# Altium PCB PCB2.PcbDoc
Units mil, origin at the board's own origin, x right, y up, seen from the top; angles counter-clockwise.
Board outline 6000 x 4000 mil, 2 copper layers (Top Layer, Bottom Layer); 25 components, 24 nets, 130 pads, 0 vias.
Unrouted connection lines stored in the file: 72.
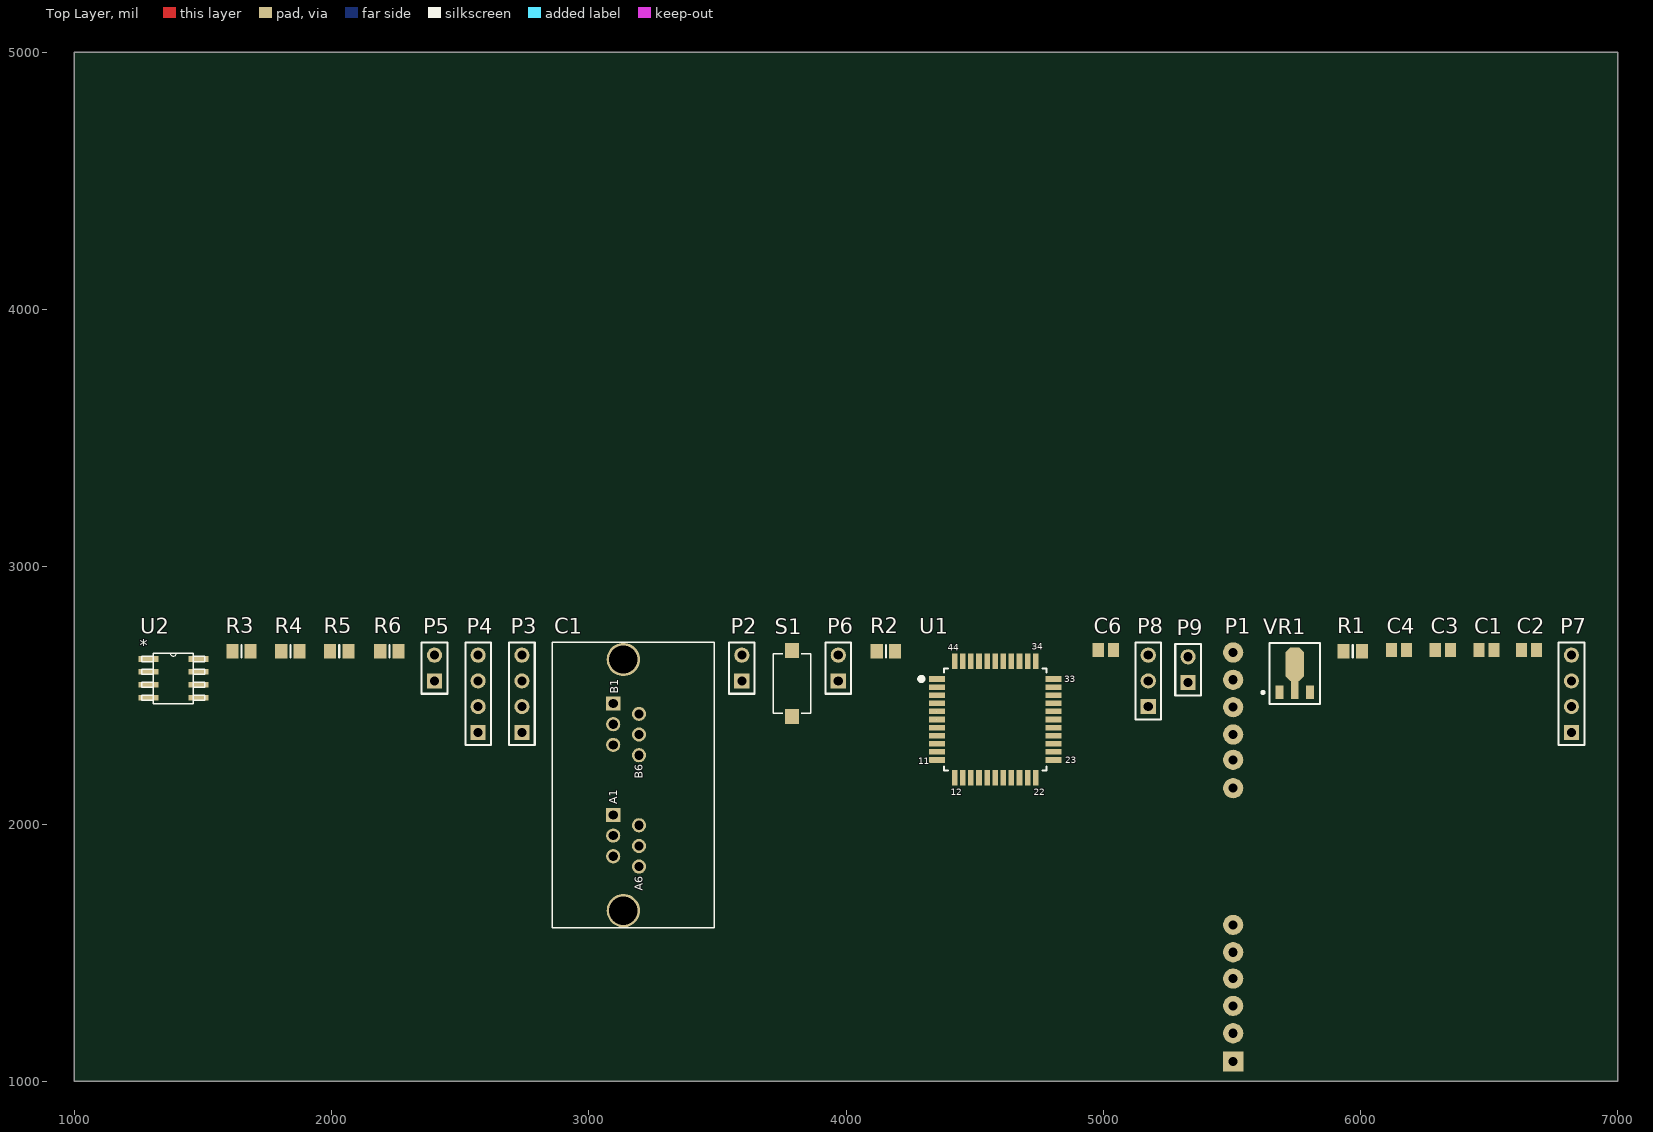
[diagram p0: Top Layer view]
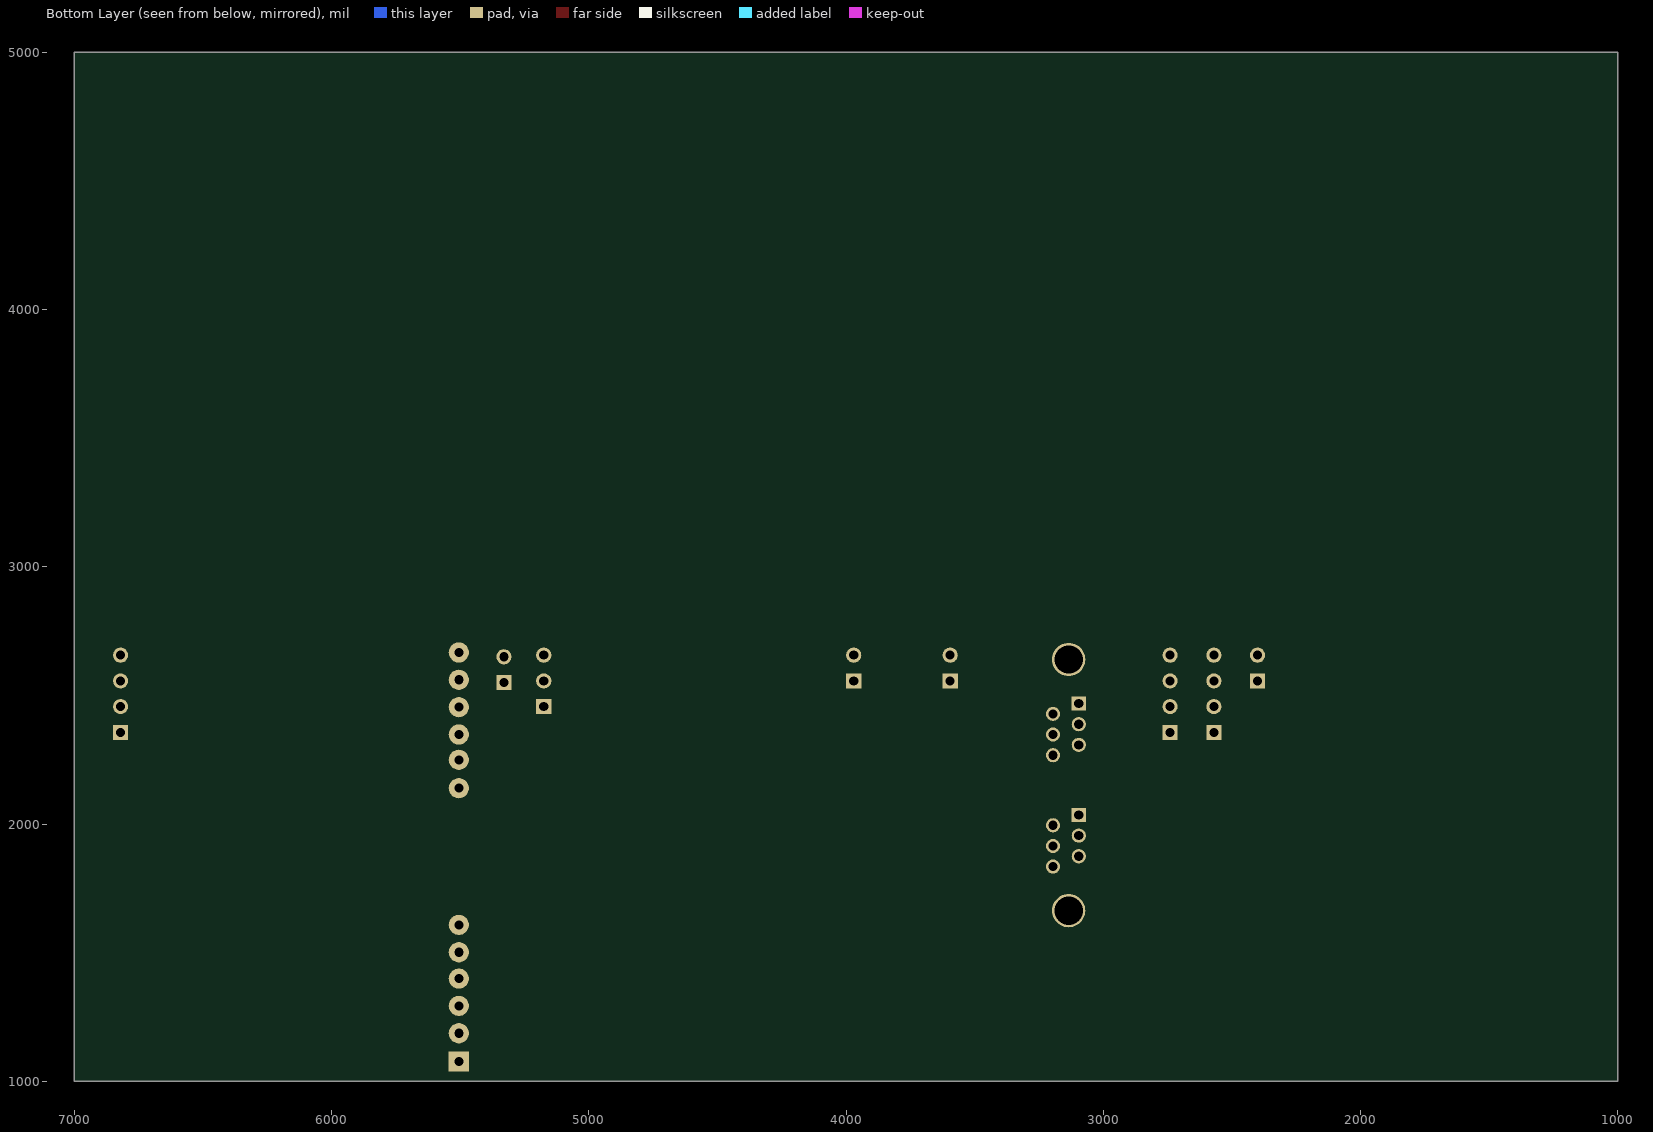
[diagram p1: Bottom Layer view, seen from below]

## Layer stack, top to bottom
Top Solder: solder mask 0.4, Solder Resist, Dk 3.5
Top Layer: signal copper 1.4
Dielectric 1: dielectric 12.6, FR-4, Dk 4.8
Bottom Layer: signal copper 1.4
Bottom Solder: solder mask 0.4, Solder Resist, Dk 3.5

## Board outline
1000,1000 7000,1000 7000,5000 1000,5000

## Design rules (kind name [scope] priority, off if disabled: settings)
Clearance [All] p1: gap=10
PolygonConnect [All] p1: connectstyle=Relief reliefconductorwidth=10 reliefentries=4 polygonreliefangle="90 Angle" airgapwidth=10
RoutingVias [All] p1: holewidth=28 width=50 viastyle="Through Hole" minholewidth=28 minwidth=50 maxholewidth=28 maxwidth=50
SolderMaskExpansion [All] p1: expansion=4
Width [All] p1: maxlimit=10 minlimit=10 preferedwidth=10
30 further rules are at their usual default settings.

## Components (designator, comment, footprint, x,y, rotation, side; value= is the part's Value field where it differs from the comment)
C1 "Cap Pol3" C0805 6490,2676.3 r0 top
C1 "WE-Modular Jack 615012149421" 615012149421 3145,2151.3 r90 top
C2 "Cap Pol3" C0805 6655,2676.3 r0 top
C3 "Cap Pol3" C0805 6320,2676.3 r0 top
C4 "Cap Pol3" C0805 6150,2676.3 r0 top
C6 "Cap Pol3" C0805 5010,2676.3 r0 top
P1 "Connector" "LCD 16x2" 5505,1076.3 r90 top
P2 "PRG" HDR1X2 3595,2556.3 r90 top
P3 "I2C" HDR1X4 2740,2356.3 r90 top
P4 "UART" HDR1X4 2570,2356.3 r90 top
P5 "FT" HDR1X2 2400,2556.3 r90 top
P6 "PRG2" HDR1X2 3970,2556.3 r90 top
P7 "HC" HDR1X4 6820,2356.3 r90 top
P8 "LM" HDR1X3 5175,2456.3 r90 top
P9 "VIN" HDR1X2 5330,2550 r90 top
R1 "Res Varistor" 6-0805_N 5970,2671.3 r0 top
R2 "Res Varistor" 6-0805_N 4155,2671.3 r0 top
R3 "Res Varistor" 6-0805_N 1650,2671.3 r0 top
R4 "Res Varistor" 6-0805_N 1840,2671.3 r0 top
R5 "Res Varistor" 6-0805_N 2030,2671.3 r0 top
R6 "Res Varistor" 6-0805_N 2225,2671.3 r0 top
S1 "434111025826" 4341x10258xx 3790,2546.3 r90 top
U1 "CY8C4245AXI-483" TQFP80P1200X1200X160-44N 4580,2406.3 r0 top
U2 "P82B715_D_8" D8 1385,2566.3 r0 top
VR1 "Volt Reg" SOT89/X.8 5745,2566.3 r0 top

## Footprints (in the part's own frame and the unit in brackets; to place one, negate y for a bottom-side part, rotate by r counter-clockwise, add the part's x,y. Pads: shape width x height; smd on the part's side, far side on the other; paste and mask are expansions set on the pad)
6-0805_N [mm] "Chip Resistor, Body 2.0x1.2mm, IPC Medium Density"
  rect 1.2x1.4 smd: 1(-0.9,0) 2(0.9,0)
  silkscreen extent 0,-0.6 0,0.6, body extent -1.07,-0.7 1.07,0.7, height 0.7
4341x10258xx [mm] "6.0*3.8mm vertical type, SMD,  height 2.5mm, white actuator, 260gf, T&R"
  rect 1.5x1.4 smd: 1(-3.25,0) 2(3.25,0)
  silkscreen extent -2.94,-1.84 2.94,1.84, body extent -3.65,-1.95 3.65,1.95, height 2.51
615012149421 [mm] "WR-MJ_Modular Jack_Tab UP_6P6C  Pre-Assembly 1x2"
  rect 1.4x1.4 hole 0.9: A1(-2.95,1.27) B1(8.05,1.27)
  round 1.4 hole 0.9: A2(-3.97,-1.27) A3(-4.99,1.27) A4(-6.01,-1.27) A5(-7.03,1.27) A6(-8.05,-1.27) B2(7.03,-1.27) B3(6.01,1.27) B4(4.99,-1.27) B5(3.97,1.27) B6(2.95,-1.27)
  round 3.3 hole 2.8: Z1(-12.4,0.27) Z2(12.4,0.27)
  round 2.8 smd: ""(-12.4,0.27)
  silkscreen extent -14.1,-8.7 14.1,7.3, body extent -14.1,-8.7 14.01,7.3, height 15.41
C0805 [mm] "Chip Capacitor, Body 2.0x1.3mm, IPC High Density"
  rect 1.1x1.4 smd: 1(-0.75,0) 2(0.75,0)
  body extent -1.1,-0.72 1.1,0.72, height 1.4
D8 [mil]
  rect 78x22 smd: 1(-97,75) 2(-97,25) 3(-97,-25) 4(-97,-75) 5(97,-75) 6(97,-25) 7(97,25) 8(97,75)
  silkscreen extent -122,-98 122,99
HDR1X2 [mm] "Connector; Header; 2 Position"
  rect 1.5x1.5 hole 0.9: 1(0,0)
  round 1.5 hole 0.9: 2(2.54,0)
  silkscreen extent -1.27,-1.27 3.81,1.27
HDR1X3 [mm] "Connector; Header; 3 Position"
  rect 1.5x1.5 hole 0.9: 1(0,0)
  round 1.5 hole 0.9: 2(2.54,0) 3(5.08,0)
  silkscreen extent -1.27,-1.27 6.35,1.27
HDR1X4 [mm] "Connector; Header; 4 Position"
  rect 1.5x1.5 hole 0.9: 1(0,0)
  round 1.5 hole 0.9: 2(2.54,0) 3(5.08,0) 4(7.62,0)
  silkscreen extent -1.27,-1.27 8.89,1.27
"LCD 16x2" [mm]
  rect 2x2 hole 0.9: 1(0,0)
  round 2 hole 0.9: 2(2.8,0) 3(5.5,0) 4(8.2,0) 5(10.8,0) 6(13.5,0) 11(27,0) 12(29.8,0) 13(32.3,0) 14(35,0) 15(37.7,0) 16(40.4,0)
SOT89/X.8 [mm] "SOT-89; Body 4.6 x 4.25 mm, inc. leads (LxW max)"
  oct 1.85x3.3 smd: 0(0,1.388)
  rect 0.8x1.35 smd: 1(-1.5,-1.387) 3(1.5,-1.387)
  rect 0.75x1.8 smd: 2(0,-1.162)
  silkscreen extent -3.27,-2.51 2.5,3.49
TQFP80P1200X1200X160-44N [mm]
  rect 1.55x0.55 smd mask+0: 1(-5.75,4) 2(-5.75,3.2) 3(-5.75,2.4) 4(-5.75,1.6) 5(-5.75,0.8) 6(-5.75,0) 7(-5.75,-0.8) 8(-5.75,-1.6) 9(-5.75,-2.4) 10(-5.75,-3.2) 11(-5.75,-4) 23(5.75,-4) 24(5.75,-3.2) 25(5.75,-2.4) 26(5.75,-1.6) 27(5.75,-0.8) 28(5.75,0) 29(5.75,0.8) 30(5.75,1.6) 31(5.75,2.4) 32(5.75,3.2) 33(5.75,4)
  rect 0.55x1.55 smd mask+0: 12(-4,-5.75) 13(-3.2,-5.75) 14(-2.4,-5.75) 15(-1.6,-5.75) 16(-0.8,-5.75) 17(0,-5.75) 18(0.8,-5.75) 19(1.6,-5.75) 20(2.4,-5.75) 21(3.2,-5.75) 22(4,-5.75) 34(4,5.75) 35(3.2,5.75) 36(2.4,5.75) 37(1.6,5.75) 38(0.8,5.75) 39(0,5.75) 40(-0.8,5.75) 41(-1.6,5.75) 42(-2.4,5.75) 43(-3.2,5.75) 44(-4,5.75)
  silkscreen extent -7.5,-5.05 5.05,5.05, body extent -5.05,-5.05 5.05,5.05, height 1.6

## Part data
C1 C2 C3 C4 C6: "Polarized Capacitor (Surface Mount)"
C1: "WR-MJ_Modular Jack_Tab UP_6P6C"
P1: library part "Header 1x16"
P2 P5 P6 P9: library part "Header 2", "Header, 2-Pin"
P3 P4 P7: library part "Header 4", "Header, 4-Pin"
P8: library part "Header 3", "Header, 3-Pin"
R1 R2 R3 R4 R5 R6: "Varistor (Voltage-Sensitive Resistor)"
S1: library part "WS-TASV, 434111025826", "WS-TASV 6.0x3.8 mm SMD"
VR1: "Voltage Regulator"

## Nets (pads, with @x,y where several pads share a name; then routed paths per layer and width w, separated by ;. In a path a pad name is that pad's centre, name@x,y a point inside that pad or via, vN(x,y) a via of type N, cw(c..) or ccw(c..) an arc to the next point about the centre after c; other vN are vias at no path point)
D4: P1.6 U1.39
D5: P1.5 U1.40
D6: P1.4 U1.41
D7: P1.3 U1.42
E: P1.11 U1.38
ECHO: P7.2 U1.26
GND: C1.2 C1.A2 C2.2 C3.2 C4.2 C6.2 P1.12 P1.16 P3.4 P4.3 P5.2 P6.1 P7.1 P8.3 P9.2 R2.1 S1.2 U1.1 U1.10 U1.36 U2.4 VR1.2
LCL: C1.A4 P3.1 R5.1 U2.7
LDA: C1.A5 P3.2 R4.1 U2.2
LED: P1.2 U1.43
NetP1_1: P1.1 R2.2
NetP1_14: P1.14 R1.1
NetP9_1: P9.1 VR1.1
OUT: P8.2 U1.24
RS: P1.13 U1.37
RX: P4.1 U1.28
SCL: R6.1 U1.20 U2.6
SDA: R3.1 U1.21 U2.3
SWDCLK: P2.1 U1.14
SWDIO: P2.2 U1.13
TRIG: P7.3 U1.25
TX: P4.2 U1.29
VCC: C1.1 C1.A3 C2.1 C3.1 C4.1 C6.1 P1.15 P3.3 P4.4 P5.1 P7.4 P8.1 R1.2 R3.2 R4.2 R5.2 R6.2 U1.19 U1.33 U1.34 U1.35 U2.8 VR1.3
XRES: P6.2 S1.1 U1.32
pads on no net: C1. C1.A1 C1.A6 C1.B1 C1.B2 C1.B3 C1.B4 C1.B5 C1.B6 C1.Z1 C1.Z2 U1.2 U1.3 U1.4 U1.5 U1.6 U1.7 U1.8 U1.9 U1.11 U1.12 U1.15 U1.16 U1.17 U1.18 U1.22 U1.23 U1.27 U1.30 U1.31 U1.44 U2.1 U2.5 VR1.0

## Text inside footprints (layer, text, board x,y; h text height)
C1: Top Overlay "B6" at 3210,2176.3 h31.5 r90; Top Overlay "B1" at 3115,2506.3 h31.5 r90; Top Overlay "A6" at 3210,1741.3 h31.5 r90; Top Overlay "A1" at 3110,2076.3 h31.5 r90
U1: Top Overlay "11" at 4280.79,2233.07 h25.59; Top Overlay "12" at 4406.77,2111.02 h25.59; Top Overlay "22" at 4729.61,2111.02 h25.59; Top Overlay "23" at 4851.65,2237.01 h25.59; Top Overlay "33" at 4847.72,2551.97 h25.59; Top Overlay "34" at 4721.73,2677.95 h25.59; Top Overlay "44" at 4394.96,2674.02 h25.59
U2: Top Overlay "*" at 1255,2658.3 h77.5; Mechanical 16 "*" at 1255,2658.3 h77.5